# Altium PCB ESP32PICOD4.PcbDoc
Units mil, origin at the board's own origin, x right, y up, seen from the top; angles counter-clockwise.
Board outline 6000 x 4000 mil, 2 copper layers (Top Layer, Bottom Layer); 79 components, 80 nets, 361 pads, 4 vias.
Unrouted connection lines stored in the file: 230.
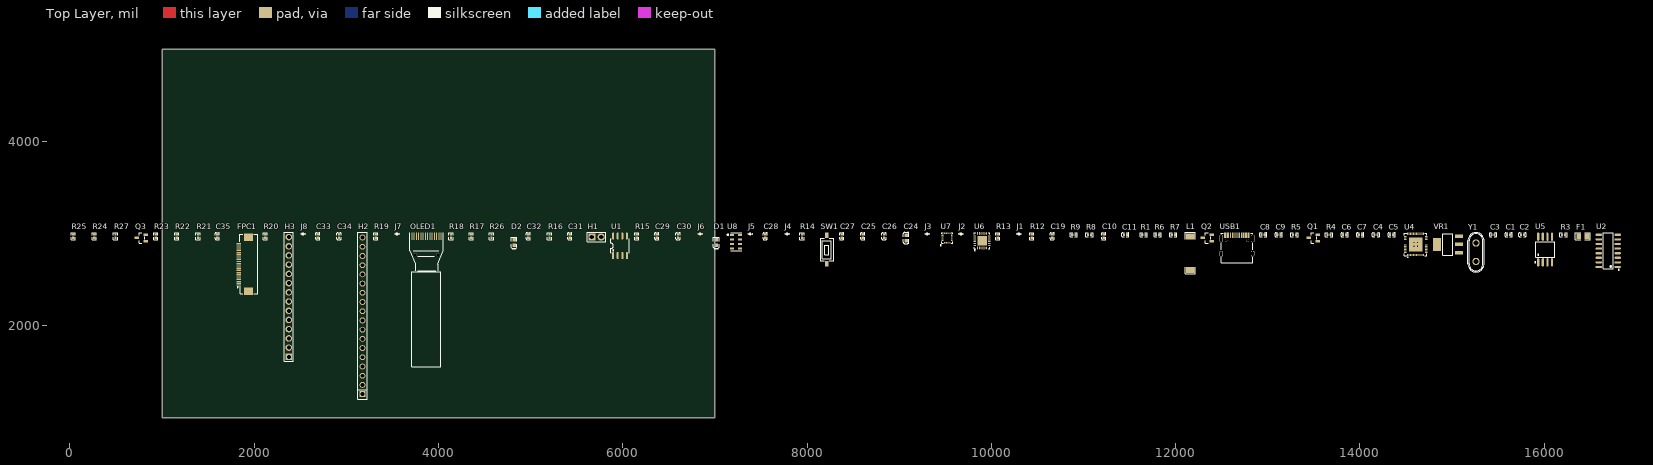
[diagram p0: Top Layer view]
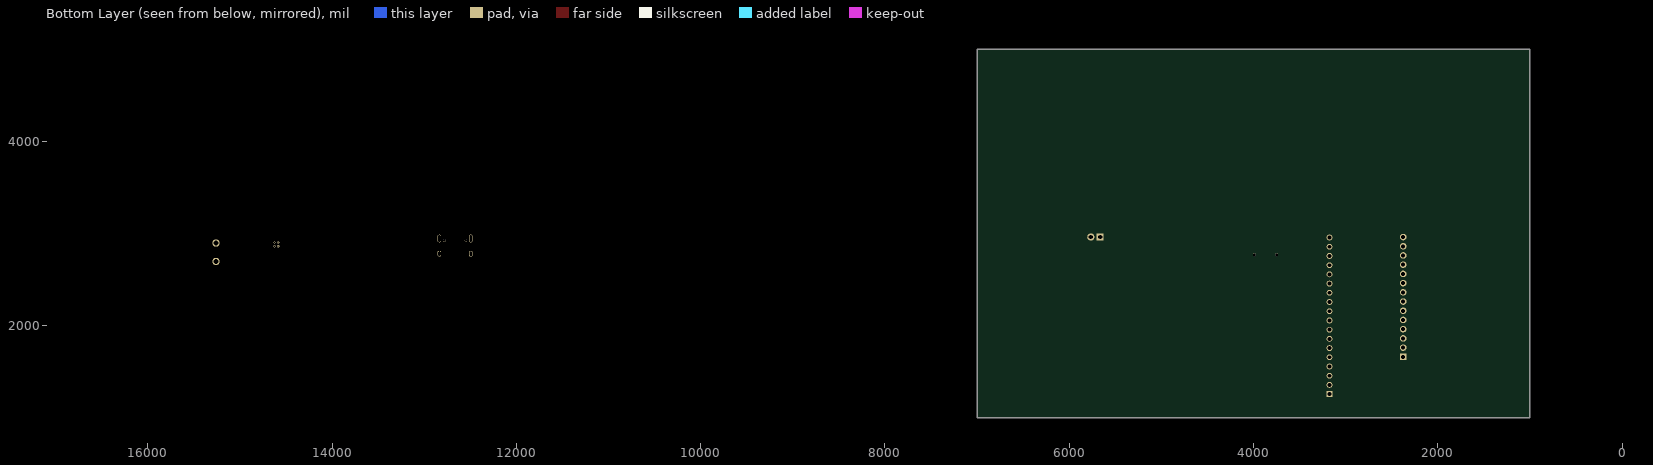
[diagram p1: Bottom Layer view, seen from below]

## Layer stack, top to bottom
Top Solder: solder mask 0.4, Solder Resist, Dk 3.5
Top Layer: signal copper 1.4
Dielectric 1: dielectric 12.6, FR-4, Dk 4.8
Bottom Layer: signal copper 1.4
Bottom Solder: solder mask 0.4, Solder Resist, Dk 3.5

## Board outline
1000,1000 7000,1000 7000,5000 1000,5000

## Design rules (kind name [scope] priority, off if disabled: settings)
Clearance [All] p1: gap=10 ignorepadtopadclearanceinfootprint=FALSE except(0: Arc-Hole Track-Hole SMDPad-Hole THPad-Hole Via-Hole Fill-Hole Poly-Hole Region-Hole Text-Hole)
PolygonConnect [All] p1: connectstyle=Relief reliefconductorwidth=10 reliefentries=4 polygonreliefangle="90 Angle" airgapwidth=10
RoomDefinition main [InComponentClass('main')] p1: confinementstyle=ConfineIn formatcopy=TRUE lockcomponents=FALSE outline 0,1190 16845,1190 16845,3120 0,3120
RoutingVias [All] p1: holewidth=28 width=50 viastyle="Through Hole" minholewidth=28 minwidth=50 maxholewidth=28 maxwidth=50
SolderMaskExpansion [All] p1: expansion=4 istentingtop=FALSE
Width [All] p1: maxlimit=10 minlimit=10 preferedwidth=10
30 further rules are at their usual default settings.

## Components (designator, comment, footprint, x,y, rotation, side; value= is the part's Value field where it differs from the comment)
C1 "10uF (106) 20% 6.3V" 0402_C 15615,2985 r0 top
C2 "100nF (104) 10% 16V" 0402_C 15765,2985 r0 top
C3 "100nF (104) 10% 16V" 0402_C 15445,2985 r0 top
C4 "22pF (220) 5% 50V" 0402_C 14175,2985 r0 top
C5 "22pF (220) 5% 50V" 0402_C 14345,2985 r0 top
C6 "10uF (106) 20% 6.3V" 0402_C 13835,2985 r0 top
C7 "100nF (104) 10% 16V" 0402_C 14005,2985 r0 top
C8 "100nF (104) 10% 16V" 0402_C 12950,2985 r0 top
C9 "100nF (104) 10% 16V" 0402_C 13120,2985 r0 top
C10 "10uF (106) 20% 6.3V" 0402_C 11220,2970 r90 top
C11 "100nF (104) 10% 16V" 0402_C 11455,2985 r0 top
C19 "2.2nF (222) 10% 50V" 0402_C 10660,2970 r90 top
C24 "2.2nF (222) 10% 50V" 0603_C 9075,2950 r90 top
C25 "2.2nF (222) 10% 50V" 0402_C 8605,2970 r90 top
C26 "4.7uF (475) 20% 10V" 0402_C 8835,2970 r90 top
C27 "100nF (104) 10% 16V" 0402_C 8375,2970 r90 top
C28 "10nF (103) 10% 50V" 0402_C 7545,2970 r90 top
C29 "2.2nF (222) 10% 50V" 0402_C 6370,2970 r90 top
C30 "100nF (104) 10% 16V" 0402_C 6600,2970 r90 top
C31 "100pF (101) 5% 50V" 0402_C 5425,2970 r90 top
C32 "15pF (150) 5% 50V" 0402_C 4975,2970 r90 top
C33 "1.0uF (105) 10% 25V" 0402_C 2690,2970 r90 top
C34 "4.7uF (475) 20% 10V" 0402_C 2920,2970 r90 top
C35 "4.7uF (475) 20% 10V" 0402_C 1600,2970 r90 top
D1 "白灯 0603" 0603_LED_S1 7015,2900 r90 top
D2 "白灯 0603" 0603_LED_S1 4820,2900 r90 top
F1 "ASMD0805-050" F0805 16420,2970 r0 top
FPC1 "FPC-05F-24PH20" FPC-SMD_24P-P0.50_FPC-05F-24PH20 1885,2665 r90 top
H1 "X6511WV-02H-C30D60" HDR-TH_2P-P2.54-V-M 5715,2960 r0 top
H2 "KH-2.54PH180-1X18P-L11.5" HDR-TH_18P-P2.54-V-M 3175,2105 r90 top
H3 "KH-2.54PH180-1X14P-L11.5" HDR-TH_14P-P2.54-V-M 2375,2310 r90 top
J1 "跳线" RES_0402 10300,2995 r0 top
J2 "跳线" RES_0402 9670,2995 r0 top
J3 "跳线" RES_0402 9305,2995 r0 top
J4 "跳线" RES_0402 7785,2995 r0 top
J5 "跳线" RES_0402 7385,2995 r0 top
J6 "跳线" RES_0402 6840,2995 r0 top
J7 "跳线" RES_0402 3550,2995 r0 top
J8 "跳线" RES_0402 2530,2995 r0 top
L1 "AN9520-245" ANT-SMD_L9.5-W2.1 12160,2785 r90 top
OLED1 "QG-2832TLBFG02" OLED-SMD_QG-9616TSWCG02 3870,2970 r90 top
Q1 "SS8050 Y1" SOT-23(SOT-23-3) 13495,2950 r0 top
Q2 "SS8050 Y1" SOT-23(SOT-23-3) 12345,2950 r0 top
Q3 "SS8050 Y1" SOT-23(SOT-23-3) 775,2950 r0 top
R1 "0Ω (0R0) ±1%" 0402_R 11655,2985 r0 top
R3 "10KΩ (1002) ±1%" 0402_R 16210,2985 r0 top
R4 "10KΩ (1002) ±1%" 0402_R 13665,2985 r0 top
R5 "12KΩ (1202) ±1%" 0402_R 13290,2985 r0 top
R6 "12KΩ (1202) ±1%" 0402_R 11805,2985 r0 top
R7 "5.1KΩ (5101) ±1%" 0402_R 11975,2985 r0 top
R8 "5.1KΩ (5101) ±1%" 0402_R 11065,2985 r0 top
R9 "49.9Ω (49R9) ±1%" 0402_R 10895,2985 r0 top
R12 "4.7KΩ (4701) ±1%" 0402_R 10440,2970 r90 top
R13 "4.7KΩ (4701) ±1%" 0402_R 10070,2970 r90 top
R14 "1KΩ (1001) ±1%" 0402_R 7945,2970 r90 top
R15 "1KΩ (1001) ±1%" 0402_R 6150,2970 r90 top
R16 "10Ω (10R0) ±1%" 0402_R 5205,2970 r90 top
R17 "1KΩ (1001) ±1%" 0402_R 4355,2970 r90 top
R18 "4.7KΩ (4701) ±1%" 0402_R 4135,2970 r90 top
R19 "4.7KΩ (4701) ±1%" 0402_R 3320,2970 r90 top
R20 "470Ω (4700) ±1%" 0402_R 2120,2970 r90 top
R21 "10Ω (10R0) ±1%" 0402_R 1390,2970 r90 top
R22 "4.7KΩ (4701) ±1%" 0402_R 1160,2970 r90 top
R23 "1KΩ (1001) ±1%" 0402_R 930,2970 r90 top
R24 "10KΩ (1002) ±1%" 0402_R 265,2970 r90 top
R25 "4.7KΩ (4701) ±1%" 0402_R 35,2970 r90 top
R26 "4.7KΩ (4701) ±1%" 0402_R 4575,2970 r90 top
R27 "4.7KΩ (4701) ±1%" 0402_R 495,2970 r90 top
SW1 "TS-1092S-B1D2-W" SW-SMD_L6.1-W3.6-LS7.9 8215,2825 r90 top
U1 "TJA1042T/1J" SOIC-8_L5.0-W4.0-P1.27-LS6.0-BL 5970,2865 r0 top
U2 "CH340G" SOIC-16_150mil 16695,2810 r90 top
U4 "ESP32" QFN-48-EP3.8 14605,2880 r0 top
U5 "GD25Q32CSIG_C318845" SOIC-8_L5.3-W5.3-P1.27-LS8.0-BL 16010,2825 r0 top
U6 "MPU-6050" QFN-24_4x4x05P 9900,2920 r0 top
U7 "HWC5883L" LPCC-16_L3.0-W3.0-P0.50-BL 9520,2950 r0 top
U8 "MS5611" MS5611 7230,2910 r0 top
USB1 "TYPEC-304-BCP16" USB-C-SMD_TYPEC-304-BCP16 12665,2880 r0 top
VR1 "AMS1117-3.3" SOT-223 14955,2880 r0 top
Y1 "XTAL" XTAL_socket 15260,2795 r90 top

## Footprints (in the part's own frame and the unit in brackets; to place one, negate y for a bottom-side part, rotate by r counter-clockwise, add the part's x,y. Pads: shape width x height; smd on the part's side, far side on the other; paste and mask are expansions set on the pad)
0402_C [mm]
  rect 0.6x0.65 smd mask+0.051: 1(-0.425,0) 2(0.425,0)
  silkscreen extent -0.97,-0.58 0.97,0.58, body extent -0.48,-0.3 0.52,0.3, height 0.2
0402_R [mm]
  rect 0.6x0.65 smd mask+0.051: 1(-0.425,0) 2(0.425,0)
  silkscreen extent -0.97,-0.58 0.97,0.58, body extent -0.57,-0.27 0.58,0.28, height 0.41
0603_C [mm]
  rect 0.93x0.98 smd: 1(-0.77,0) 2(0.77,0)
  silkscreen extent -1.53,-0.79 1.54,0.79, body extent -0.8,-0.4 0.8,0.4, height 0.3
0603_LED_S1 [mm]
  rect 0.93x0.98 smd: A(0.77,0) K(-0.77,0)
  silkscreen extent -1.98,-0.79 1.54,0.79, body extent -0.8,-0.4 0.8,0.4, height 0.6
ANT-SMD_L9.5-W2.1 [mm] "陶瓷天线pcb"
  rect 1.71x2.268 smd: 1(-4.63,0) 2(4.63,0)
  silkscreen extent -5.71,-1.36 5.71,1.36, body extent -4.75,-1.05 4.75,1.05
F0805 [mm]
  rect 1.335x1.458 smd: 1(-1.142,0) 2(1.142,0)
  silkscreen extent -2.04,-0.96 2.04,0.96
FPC-SMD_24P-P0.50_FPC-05F-24PH20 [mm]
  rect 0.3x1.25 smd: 1(-5.75,1.288) 2(-5.25,1.288) 3(-4.75,1.288) 4(-4.25,1.288) 5(-3.75,1.288) 6(-3.25,1.288) 7(-2.75,1.288) 8(-2.25,1.288) 9(-1.75,1.288) 10(-1.25,1.288) 11(-0.75,1.288) 12(-0.25,1.288) 13(0.25,1.288) 14(0.75,1.288) 15(1.25,1.288) 16(1.75,1.288) 17(2.25,1.288) 18(2.75,1.288) 19(3.25,1.288) 20(3.75,1.288) 21(4.25,1.288) 22(4.75,1.288) 23(5.25,1.288) 24(5.75,1.288)
  rect 2x2.5 smd: 25(7.44,-1.288) 26(-7.44,-1.288)
  silkscreen extent -8.2,-3.91 8.2,1.78, body extent -8.85,-3.49 8.85,0.66, height 1.9
HDR-TH_2P-P2.54-V-M [mm]
  rect 2x2 hole 1.2: 1(-1.27,0)
  round 2 hole 1.2: 2(1.27,0)
  silkscreen extent -2.54,-1.27 2.54,1.27
HDR-TH_14P-P2.54-V-M [mm]
  rect 1.8x1.8 hole 1.1: 1(-16.51,0)
  round 1.8 hole 1.1: 2(-13.97,0) 3(-11.43,0) 4(-8.89,0) 5(-6.35,0) 6(-3.81,0) 7(-1.27,0) 8(1.27,0) 9(3.81,0) 10(6.35,0) 11(8.89,0) 12(11.43,0) 13(13.97,0) 14(16.51,0)
  silkscreen extent -17.78,-1.27 17.78,1.27
HDR-TH_18P-P2.54-V-M [mm]
  rect 1.6x1.6 hole 1.05: 1(-21.59,0)
  round 1.6 hole 1.05: 2(-19.05,0) 3(-16.51,0) 4(-13.97,0) 5(-11.43,0) 6(-8.89,0) 7(-6.35,0) 8(-3.81,0) 9(-1.27,0) 10(1.27,0) 11(3.81,0) 12(6.35,0) 13(8.89,0) 14(11.43,0) 15(13.97,0) 16(16.51,0) 17(19.05,0) 18(21.59,0)
  silkscreen extent -22.98,-1.25 22.98,1.25
LPCC-16_L3.0-W3.0-P0.50-BL [mm]
  rect 0.3x0.45 smd: 1(-0.749,-1.275) 2(-0.249,-1.275) 3(0.251,-1.275) 4(0.751,-1.275) 9(0.75,1.275) 10(0.25,1.275) 11(-0.25,1.275) 12(-0.749,1.275)
  rect 0.45x0.3 smd: 5(1.275,-0.748) 6(1.275,-0.248) 7(1.275,0.252) 8(1.275,0.752) 13(-1.275,0.752) 14(-1.275,0.252) 15(-1.275,-0.248) 16(-1.275,-0.748)
  silkscreen extent -1.87,-2.12 1.5,1.5
MS5611 [mm]
  rect 1.1x0.6 smd: 1(-1.1,1.875) 2(-1.1,0.625) 3(-1.1,-0.625) 4(-1.1,-1.875) 5(1.1,-1.875) 6(1.1,-0.625) 7(1.1,0.625) 8(1.1,1.875)
  silkscreen extent -2.41,-2.5 1.5,2.5
OLED-SMD_QG-9616TSWCG02 [mm]
  rect 2x0.32 smd: 1(0,-4.03) 2(0,-3.41) 3(0,-2.79) 4(0,-2.17) 5(0,-1.55) 6(0,-0.93) 7(0,-0.31) 8(0,0.31) 9(0,0.93) 10(0,1.55) 11(0,2.17) 12(0,2.79) 13(0,3.409) 14(0,4.03)
  round 0.8 hole 0.8 unplated: ""(-5.15,-3.1) ""(-5.15,3.1)
  silkscreen extent -36.05,-4.65 0.93,4.65
QFN-24_4x4x05P [mm]
  rect 2.68x2.68 smd mask+0.051: 0(0,0)
  oval 0.28x0.7 smd mask+0.051: 1(-1.25,-2) 2(-0.75,-2) 3(-0.25,-2) 4(0.25,-2) 5(0.75,-2) 6(1.25,-2) 13(1.25,2) 14(0.75,2) 15(0.25,2) 16(-0.25,2) 17(-0.75,2) 18(-1.25,2)
  oval 0.7x0.28 smd mask+0.051: 7(2,-1.25) 8(2,-0.75) 9(2,-0.25) 10(2,0.25) 11(2,0.75) 12(2,1.25) 19(-2,1.25) 20(-2,0.75) 21(-2,0.25) 22(-2,-0.25) 23(-2,-0.75) 24(-2,-1.25)
  silkscreen extent -2.15,-2.72 2.15,2.15
QFN-48-EP3.8 [mm]
  rect 0.2x0.665 smd: 1(-2.2,-2.908) 2(-1.8,-2.908) 3(-1.4,-2.908) 4(-1,-2.908) 5(-0.6,-2.908) 6(-0.2,-2.908) 7(0.2,-2.908) 8(0.6,-2.908) 9(1,-2.908) 10(1.4,-2.908) 11(1.8,-2.908) 12(2.2,-2.908) 25(2.2,2.908) 26(1.8,2.908) 27(1.4,2.908) 28(1,2.908) 29(0.6,2.908) 30(0.2,2.908) 31(-0.2,2.908) 32(-0.6,2.908) 33(-1,2.908) 34(-1.4,2.908) 35(-1.8,2.908) 36(-2.2,2.908)
  rect 0.665x0.2 smd: 13(2.908,-2.2) 14(2.908,-1.8) 15(2.908,-1.4) 16(2.908,-1) 17(2.908,-0.6) 18(2.908,-0.2) 19(2.908,0.2) 20(2.908,0.6) 21(2.908,1) 22(2.908,1.4) 23(2.908,1.8) 24(2.908,2.2) 37(-2.908,2.2) 38(-2.908,1.8) 39(-2.908,1.4) 40(-2.908,1) 41(-2.908,0.6) 42(-2.908,0.2) 43(-2.908,-0.2) 44(-2.908,-0.6) 45(-2.908,-1) 46(-2.908,-1.4) 47(-2.908,-1.8) 48(-2.908,-2.2)
  rect 3.8x3.8 smd: 49(0,0)
  silkscreen extent -3.08,-3.61 3.08,3.08, body extent -2.5,-2.5 2.5,2.5, height 1.12
RES_0402 [mil]
  rrect50% 20x20 smd: 1(-20,0) 2(20,0)
  silkscreen extent -6,-10 6,10, body extent -20,-10 20,10, height 14
SOIC-8_L5.0-W4.0-P1.27-LS6.0-BL [mil]
  oval 22.38x76.78 smd: 1(-75,-106.5) 2(-25,-106.5) 3(25,-106.5) 4(75,-106.5) 5(75,106.5) 6(25,106.5) 7(-25,106.5) 8(-75,106.5)
  silkscreen extent -98,-75 98,75
SOIC-8_L5.3-W5.3-P1.27-LS8.0-BL [mm]
  oval 0.63x2.25 smd: 1(-1.905,-3.53) 2(-0.635,-3.53) 3(0.635,-3.53) 4(1.905,-3.53) 5(1.905,3.53) 6(0.635,3.53) 7(-0.635,3.53) 8(-1.905,3.53)
  silkscreen extent -2.82,-3.68 2.64,2.18
SOIC-16_150mil [mm]
  oval 0.6x1.8 smd: 1(-4.445,-2.6) 2(-3.175,-2.6) 3(-1.905,-2.6) 4(-0.635,-2.6) 5(0.635,-2.6) 6(1.905,-2.6) 7(3.175,-2.6) 8(4.445,-2.6) 9(4.445,2.6) 10(3.175,2.6) 11(1.905,2.6) 12(0.635,2.6) 13(-0.635,2.6) 14(-1.905,2.6) 15(-3.175,2.6) 16(-4.445,2.6)
  silkscreen extent -5.4,-3.05 4.97,1.4, body extent -4.95,-2.97 4.95,3.03, height 1.75
SOT-23(SOT-23-3) [mm]
  rect 1.25x0.7 smd: 1(1.25,-0.95) 2(1.25,0.95) 3(-1.25,0)
  silkscreen extent -0.65,-1.46 0.9,1.46, body extent -1.5,-1.5 1.5,1.5, height 1.3
SOT-223 [mm]
  rect 2.2x1 smd: 1(3,-2.3) 2(3,0) 3(3,2.3)
  rect 2.2x3.5 smd: 2(-3,0)
  silkscreen extent -1.4,-3 1.4,3, body extent -3.49,-3.24 3.49,3.24, height 1.64
SW-SMD_L6.1-W3.6-LS7.9 [mm]
  rect 1.5x1 smd: 1(-3.95,0) 2(3.95,0)
  silkscreen extent -3.1,-1.85 3.1,1.85
USB-C-SMD_TYPEC-304-BCP16 [mm]
  oval 1x2.1 hole 0.6 slot 1.8 at 90 deg: 13(-4.32,1.633) 14(4.32,1.633)
  oval 1x1.6 hole 0.6 slot 1.2 at 90 deg: 15(-4.32,-2.547) 16(4.32,-2.547)
  rect 0.6x1.45 smd: A1B12(-3.225,2.547) A4B9(-2.45,2.547) B1A12(3.22,2.547) B4A9(2.45,2.547)
  rect 0.3x1.45 smd: A5(-1.26,2.532) A6(-0.25,2.547) A7(0.25,2.547) A8(1.25,2.547) B5(1.75,2.547) B6(0.75,2.547) B7(-0.75,2.547) B8(-1.75,2.547)
  round 0.7 hole 0.7 unplated: ""(-2.98,1.102) ""(2.98,1.102)
  silkscreen extent -4.32,-5.08 4.32,3.05
XTAL_socket [mil]
  round 80 hole 53: 1(100,0) 2(-100,0)
  silkscreen extent -215,-89 214,89, body extent -214,-89 214,89, height 102

## Part data
C1 C6 C10: library part "0402 10uF (106) 20% 6.3V", "贴片电容", Package=0402, SuppliersPartNumber=C15525, ComponentLink1Description=供应商链接, ComponentLink1URL=http://www.szlcsc.com/product/details_16204.html, Supplier=LC
C2 C3 C7 C8 C9 C11 C27 C30: library part "0402 100nF (104) 10% 16V", "贴片电容", Package=0402, SuppliersPartNumber=C1525, ComponentLink1Description=供应商链接, ComponentLink1URL=http://www.szlcsc.com/product/details_1877.html, Supplier=LC
C4 C5: library part "0402 22pF (220) 5% 50V", "贴片电容", Package=0402, SuppliersPartNumber=C1555, ComponentLink1Description=供应商链接, ComponentLink1URL=http://www.szlcsc.com/product/details_1907.html, Supplier=LC
C19 C25 C29: library part "0402 2.2nF (222) 10% 50V", "贴片电容", Package=0402, SuppliersPartNumber=C1531, ComponentLink1Description=供应商链接, ComponentLink1URL=http://www.szlcsc.com/product/details_1883.html, Supplier=LC
C24: library part "0603 2.2nF (222) 10% 50V", "贴片电容", Package=0603, SuppliersPartNumber=C1604, ComponentLink1Description=供应商链接, ComponentLink1URL=http://www.szlcsc.com/product/details_1956.html, Supplier=LC
C26 C34 C35: library part "0402 4.7uF (475) 20% 10V", "贴片电容", Package=0402, SuppliersPartNumber=C23733, ComponentLink1Description=供应商链接, ComponentLink1URL=http://www.szlcsc.com/product/details_24469.html, Supplier=LC
C28: library part "0402 10nF (103) 10% 50V", "贴片电容", Package=0402, SuppliersPartNumber=C15195, ComponentLink1Description=供应商链接, ComponentLink1URL=http://www.szlcsc.com/product/details_15869.html, Supplier=LC
C31: library part "0402 100pF (101) 5% 50V", "贴片电容", Package=0402, SuppliersPartNumber=C1546, ComponentLink1Description=供应商链接, ComponentLink1URL=http://www.szlcsc.com/product/details_1898.html, Supplier=LC
C32: library part "0402 15pF (150) 5% 50V", "贴片电容", Package=0402, SuppliersPartNumber=C1548, ComponentLink1Description=供应商链接, ComponentLink1URL=http://www.szlcsc.com/product/details_1900.html, Supplier=LC
C33: library part "0402 1.0uF (105) 10% 25V", "贴片电容", Package=0402, SuppliersPartNumber=C52923, ComponentLink1Description=供应商链接, ComponentLink1URL=http://www.szlcsc.com/product/details_53938.html, Supplier=LC
D1 D2: library part "0603 白灯", "发光二极管", Package=0603, SuppliersPartNumber=C2290, ComponentLink1Description=供应商链接, ComponentLink1URL=http://www.szlcsc.com/product/details_2663.html, Supplier=LC
F1: BOM_JLCPCB Part Class="Extended Part", BOM_Manufacturer=JDTFUSE, BOM_Manufacturer Part=ASMD0805-050, BOM_Supplier=LCSC, BOM_Supplier Part=C135329, Contributor=LCSC, spicePre=F, spiceSymbolName=ASMD0805-050
FPC1: "FPC24脚", BOM_Manufacturer=XUNPU(讯普), BOM_Manufacturer Part=FPC-05F-24PH20, BOM_Supplier=LCSC, BOM_Supplier Part=C2856805, Contributor=LCSC, spicePre=F, spiceSymbolName=FPC-05F-24PH20
H1: library part HDR-2P, BOM_JLCPCB Part Class="Extended Part", BOM_Manufacturer="XKB Connectivity", BOM_Manufacturer Part=X6511WV-02H-C30D60, BOM_Supplier=LCSC, BOM_Supplier Part=C706874, Contributor=LCSC, spicePre=H, spiceSymbolName=X6511WV-02H-C30D60
H2: library part HDR-18P, BOM_Manufacturer=kinghelm(金航标), BOM_Manufacturer Part=KH-2.54PH180-1X18P-L11.5, BOM_Supplier=LCSC, BOM_Supplier Part=C2905492, Contributor=LCSC, spicePre=H, spiceSymbolName=KH-2.54PH180-1X18P-L11.5
H3: library part HDR-14P, "排针", BOM_Manufacturer=kinghelm(金航标), BOM_Manufacturer Part=KH-2.54PH180-1X14P-L11.5, BOM_Supplier=LCSC, BOM_Supplier Part=C2905490, Contributor=LCSC, spicePre=H, spiceSymbolName=KH-2.54PH180-1X14P-L11.5
J1 J2 J3 J4 J5 J6 J7 J8: "Resistor", LatestRevisionDate=17-Jul-2002, LatestRevisionNote="Re-released for DXP Platform.", PackageDescription="Axial Device, Thru-Hole; 2 Leads; 0.4 in Pin Spacing", PackageReference=AXIAL-0.4, Published=8-Jun-2000, Publisher="Altium Limited"
L1: "陶瓷wifi/bt天线", BOM_JLCPCB Part Class="Extended Part", BOM_Manufacturer=Rainsun, BOM_Manufacturer Part=AN9520-245, BOM_Supplier=LCSC, BOM_Supplier Part=C99665, spicePre=L, spiceSymbolName=AN9520-245
OLED1: library part OLED, BOM_JLCPCB Part Class="Extended Part", BOM_Manufacturer=Allvision, BOM_Manufacturer Part=QG-2832TLBFG02, BOM_Supplier=LCSC, BOM_Supplier Part=C91220, Contributor=LCSC, spicePre=O, spiceSymbolName=QG-2832TLBFG02
Q1 Q2 Q3: library part "SOT-23 SS8050 Y1", "三极管", Package=SOT-23, SuppliersPartNumber=C2150, ComponentLink1Description=供应商链接, ComponentLink1URL=http://www.szlcsc.com/product/details_2507.html, Supplier=LC
R1: library part "0402 0Ω (0R0) 1%", "贴片电阻", Package=0402, SuppliersPartNumber=C17168, ComponentLink1Description=供应商链接, ComponentLink1URL=http://www.szlcsc.com/product/details_17853.html, Supplier=LC
R3 R4 R24: library part "0402 10KΩ (1002) 1%", "贴片电阻", Package=0402, SuppliersPartNumber=C25744, ComponentLink1Description=供应商链接, ComponentLink1URL=http://www.szlcsc.com/product/details_26487.html, Supplier=LC
R5 R6: library part "0402 12KΩ (1202) 1%", "贴片电阻", Package=0402, SuppliersPartNumber=C25752, ComponentLink1Description=供应商链接, ComponentLink1URL=http://www.szlcsc.com/product/details_26495.html, Supplier=LC
R7 R8: library part "0402 5.1KΩ (5101) 1%", "贴片电阻", Package=0402, SuppliersPartNumber=C25905, ComponentLink1Description=供应商链接, ComponentLink1URL=http://www.szlcsc.com/product/details_26648.html, Supplier=LC
R9: library part "0402 49.9Ω (49R9) 1%", "贴片电阻", Package=0402, SuppliersPartNumber=C25120, ComponentLink1Description=供应商链接, ComponentLink1URL=http://www.szlcsc.com/product/details_25863.html, Supplier=LC
R12 R13 R18 R19 R22 R25 R26 R27: library part "0402 4.7KΩ (4701) 1%", "贴片电阻", Package=0402, SuppliersPartNumber=C25900, ComponentLink1Description=供应商链接, ComponentLink1URL=http://www.szlcsc.com/product/details_26643.html, Supplier=LC
R14 R15 R17 R23: library part "0402 1KΩ (1001) 1%", "贴片电阻", Package=0402, SuppliersPartNumber=C11702, ComponentLink1Description=供应商链接, ComponentLink1URL=http://www.szlcsc.com/product/details_12256.html, Supplier=LC
R16 R21: library part "0402 10Ω (10R0) 1%", "贴片电阻", Package=0402, SuppliersPartNumber=C25077, ComponentLink1Description=供应商链接, ComponentLink1URL=http://www.szlcsc.com/product/details_25820.html, Supplier=LC
R20: library part "0402 470Ω (4700) 1%", "贴片电阻", Package=0402, SuppliersPartNumber=C25117, ComponentLink1Description=供应商链接, ComponentLink1URL=http://www.szlcsc.com/product/details_25860.html, Supplier=LC
SW1: "触控开关", BOM_JLCPCB Part Class="Extended Part", BOM_Manufacturer=Yuandi(台湾元迪), BOM_Manufacturer Part=TS-1092S-B1D2-W, BOM_Supplier=LCSC, BOM_Supplier Part=C782859, Contributor=LCSC, spicePre=S, spiceSymbolName=TS-1092S-B1D2-W
U1: "CAN芯片", BOM_JLCPCB Part Class="Extended Part", BOM_Manufacturer=NXP, BOM_Manufacturer Part=TJA1042T/1J, BOM_Supplier=LCSC, BOM_Supplier Part=C53670, spicePre=U, spiceSymbolName=TJA1042T/1J
U2: library part CH340G_[C14267], "USB", Package=SOIC-16_150mil, SuppliersPartNumber=C14267, ComponentLink1Description=供应商链接, ComponentLink1URL=http://www.szlcsc.com/product/details_14927.html, Supplier=LC
U4: BOM_JLCPCB Part Class="Extended Part", BOM_Manufacturer=ESPRESSIF, BOM_Manufacturer Part=ESP32, BOM_Supplier=LCSC, BOM_Supplier Part=C80134, spicePre=U, spiceSymbolName=ESP32
U5: BOM_JLCPCB Part Class="Extended Part", BOM_Manufacturer="GigaDevice Semicon Beijing", BOM_Manufacturer Part=GD25Q32CSIG, BOM_Supplier=LCSC, BOM_Supplier Part=C318845, Contributor=LCSC, spicePre=U, spiceSymbolName=GD25Q32CSIG_C318845
U6: library part MPU-6050_[C24112], "传感器", Package=QFN-24_4x4x05P, SuppliersPartNumber=C24112, ComponentLink1Description=供应商链接, ComponentLink1URL=http://www.szlcsc.com/product/details_24852.html, Supplier=LC
U7: library part HMC5883L
USB1: BOM_Manufacturer=XUNPU, BOM_Manufacturer Part=TYPEC-304-BCP16, BOM_Supplier=LCSC, BOM_Supplier Part=C720629, Contributor=LCSC, spicePre=U, spiceSymbolName=TYPEC-304-BCP16
VR1: library part "SOT-223 AMS1117-3.3", "低压差线性稳压(LDO)", Package=SOT-223, SuppliersPartNumber=C6186, ComponentLink1Description=供应商链接, ComponentLink1URL=http://www.szlcsc.com/product/details_6652.html, Supplier=LC
Y1: "Crystal Oscillator", LatestRevisionDate=17-Jul-2002, LatestRevisionNote="Re-released for DXP Platform.", PackageDescription="Crystal, Thru-Hole; 2 Leads; Body 3.1 x 8.2 mm (Dia.xH)", PackageReference=R38, Published=8-Jun-2000, Publisher="Altium Limited"

## Via types
v1: diameter 24, hole 12, Top Layer to Bottom Layer, 4 vias

## Nets (pads, with @x,y where several pads share a name; then routed paths per layer and width w, separated by ;. In a path a pad name is that pad's centre, name@x,y a point inside that pad or via, vN(x,y) a via of type N, cw(c..) or ccw(c..) an arc to the next point about the centre after c; other vN are vias at no path point)
3V3: C6.2 C7.2 C25.2 C28.2 C29.2 C30.2 C33.2 C34.2 FPC1.1 FPC1.4 FPC1.5 H3.13 OLED1.14 R1.2 R12.1 R13.1 R15.1 R17.1 R18.1 R19.1 R22.2 R24.1 R26.1 U1.5 U6.8 U6.13 U7.2 U7.13 U8.1 U8.2 VR1.2
3V3A: C10.2 C11.2 R1.1 R4.2 U4.1 U4.3 U4.4 U4.19 U4.37 U4.43 U4.46
5VD: C1.2 C2.2 F1.2 U1.3 U2.16 VR1.3
CAN_Rx: C32.2 J5.1 R26.2 U1.4
CAN_Tx: J4.1 U1.1
CH340G_Rx: R9.1 U2.3
CH340G_Tx: U2.2 U4.40
DTR: Q2.2 R5.2 U2.13
EN: C8.2 Q1.3 R4.1 R14.2 U4.9
GND: C1.1 C2.1 C3.2 C4.1 C5.1 C6.1 C7.1 C8.1 C9.1 C10.1 C11.1 C19.2 C25.1 C26.1 C27.1 C28.1 C29.1 C30.1 C32.1 C33.1 C34.1 C35.1 D1.K FPC1.3 FPC1.13 FPC1.14 FPC1.15 FPC1.16 FPC1.17 FPC1.18 FPC1.19 FPC1.20 FPC1.23 FPC1.24 H2.17 H2.18 L1.2 OLED1.7 Q3.2 R3.1 R7.2 R8.2 R20.1 R25.1 R27.1 SW1.1 U1.2 U2.1 U4.49 U5.4 U6.1 U6.9 U6.11 U6.18 U7.9 U7.11 U8.3 U8.4 U8.5 USB1.13 USB1.14 USB1.15 USB1.16 USB1.A1B12 VR1.1
  other v1: 14585.32,2860.31 14624.69,2860.31 14585.32,2899.68 14624.69,2899.68
GPIO0: H3.12 Q2.3 U4.23
GPIO2: FPC1.10 H3.11 U4.22
GPIO4: H2.16 J5.2 U4.24
GPIO5: H3.10 J4.2 U4.34
GPIO9: H2.9 U4.28 U5.7
GPIO10: H2.8 U4.29 U5.3
GPIO12: H3.9 R3.2 R23.1 U4.18
GPIO13: H2.15 U4.20
GPIO14: FPC1.21 H2.14 U4.17
GPIO15: H2.13 U4.21
GPIO16: H3.2 U4.25
GPIO17: H3.1 U4.27
GPIO18: FPC1.9 H2.7 U4.35
GPIO19: H2.6 U4.38
GPIO21: H2.5 J7.2 U4.42
GPIO22: H2.4 J8.2 U4.39
GPIO23: FPC1.12 H2.3 U4.36
GPIO25: H2.2 J6.2 U4.14
GPIO26: FPC1.7 H2.1 U4.15
GPIO27: D2.K H2.12 U4.16
GPIO32: H2.11 J1.2 U4.12
GPIO33: H2.10 J2.2 U4.13
GPIO34: H3.8 J3.2 U4.10
GPIO35: H3.7 U4.11
GPIO37: H3.4 U4.6
GPIO38: H3.5 U4.7
IMUINT: J3.1 U6.12
IMUSCL: J2.1 R13.2 U6.23 U7.1 U8.8
IMUSDA: J1.1 R12.2 U6.24 U7.16 U8.7
LCD_CS: FPC1.8 R27.2
LEDK: FPC1.2 R21.2
NetC3_1: C3.1 U2.4
NetC4_2: C4.2 U2.7 Y1.1
NetC5_2: C5.2 U2.8 Y1.2
NetC19_1: C19.1 U6.20
NetC24_1: C24.1 U7.12
NetC24_2: C24.2 U7.8
NetC26_2: C26.2 U7.10
NetC27_2: C27.2 U6.10
NetC31_1: C31.1 H1.2 R16.1 U1.6
NetC31_2: C31.2 H1.1 R16.2 U1.7
NetC35_2: C35.2 OLED1.13
NetD1_A: D1.A R15.2
NetD2_A: D2.A R17.2
NetFPC1_6: FPC1.6 R22.1 R25.2
NetL1_1: L1.1 U4.2
NetOLED1_5: OLED1.5 OLED1.8
NetOLED1_12: OLED1.12 R20.2
NetQ1_1: Q1.1 R5.1
NetQ2_1: Q2.1 R6.1
NetQ3_1: Q3.1 R23.2 R24.2
NetQ3_3: Q3.3 R21.1
NetR7_1: R7.1 USB1.B5
NetR8_1: R8.1 USB1.A5
NetR9_2: R9.2 U4.41
NetR14_1: R14.1 SW1.2
OLED_SCL: J8.1 R19.2
OLED_SDA: J7.1 R18.2
RTS: Q1.2 R6.2 U2.14
SD0: U4.32 U5.2
SD1: U4.33 U5.5
SD_CLK: U4.31 U5.6
SD_CMD: U4.30 U5.1
SENSOR_VN: H3.6 U4.8
SENSOR_VP: H3.3 U4.5
STB: J6.1 U1.8
USB-DN: U2.6 USB1.A7 USB1.B7
USB-DP: U2.5 USB1.A6 USB1.B6
VBUS: F1.1 H3.14 USB1.A4B9
VDD_SDIO: C9.2 U4.26 U5.8
pads on no net: FPC1.11 FPC1.22 FPC1.25 FPC1.26 OLED1. OLED1.1 OLED1.2 OLED1.3 OLED1.4 OLED1.6 OLED1.9 OLED1.10 OLED1.11 U2.9 U2.10 U2.11 U2.12 U2.15 U4.44 U4.45 U4.47 U4.48 U6.0 U6.2 U6.3 U6.4 U6.5 U6.6 U6.7 U6.14 U6.15 U6.16 U6.17 U6.19 U6.21 U6.22 U7.3 U7.4 U7.5 U7.6 U7.7 U7.14 U7.15 U8.6 USB1. USB1.A8 USB1.B1A12 USB1.B4A9 USB1.B8